# EAGLE board 3_draft_onBoard (EAGLE 8.1.0)

Size 88.57 x 88.89 mm. Coordinates in mm from the lower left corner, seen from the top.
Outline: 0,0 88.57,0 88.57,88.89 0,88.89 0,0
Copper layers (1*16): Top 0.035mm / dielectric 1.5mm / Bottom 0.035mm
Design rules "default *": minimum track width 8mil, minimum drill 14mil, track to track 8mil, track to pad 8mil, pad to pad 8mil, via to via 8mil, smd to smd 8mil, copper to edge 40mil, drill to drill 8mil, minimum pad ring 10mil, minimum via ring 8mil, stop-mask expansion 4mil, vias tented up to drill 0mil, thermal gap 10mil

## Footprints (pad centres in the part's own frame; a part is rotated, then mirrored left to right if it is on the bottom)
QFP80P900X900X120-32N = smd 1.473 x 0.508: 1 -4.242,2.794; 2 -4.242,2.007; 3 -4.242,1.194; 4 -4.242,0.406; 5 -4.242,-0.406; 6 -4.242,-1.194; 7 -4.242,-2.007; 8 -4.242,-2.794; 17 4.242,-2.794; 18 4.242,-2.007; 19 4.242,-1.194; 20 4.242,-0.406; 21 4.242,0.406; 22 4.242,1.194; 23 4.242,2.007; 24 4.242,2.794 | smd 0.508 x 1.473: 9 -2.794,-4.242; 10 -2.007,-4.242; 11 -1.194,-4.242; 12 -0.406,-4.242; 13 0.406,-4.242; 14 1.194,-4.242; 15 2.007,-4.242; 16 2.794,-4.242; 25 2.794,4.242; 26 2.007,4.242; 27 1.194,4.242; 28 0.406,4.242; 29 -0.406,4.242; 30 -1.194,4.242; 31 -2.007,4.242; 32 -2.794,4.242
0402-CAP = smd 0.7 x 0.9: 1 -0.65,0; 2 0.65,0
EIA3216 = smd 1.4 x 1.6: A 1.4,0; C -1.4,0
SOT23-3 = smd 0.8 x 0.9: 1 -0.95,-1; 2 0.95,-1; 3 0,1.1
0603 = smd 1.1 x 1: 1 -0.85,0; 2 0.85,0
SSOP20_L = smd 0.381 x 1.143: 1 -2.857,-2.68; 2 -2.223,-2.68; 3 -1.587,-2.68; 4 -0.953,-2.68; 5 -0.318,-2.68; 6 0.318,-2.68; 7 0.953,-2.68; 8 1.587,-2.68; 9 2.223,-2.68; 10 2.857,-2.68; 11 2.857,2.68; 12 2.223,2.68; 13 1.587,2.68; 14 0.953,2.68; 15 0.318,2.68; 16 -0.318,2.68; 17 -0.953,2.68; 18 -1.587,2.68; 19 -2.223,2.68; 20 -2.857,2.68
SOT223 = smd 1.219 x 2.235: 1 -2.311,-3.099; 2 0,-3.099; 3 2.311,-3.099 | smd 3.6 x 2.2: 4 0,3.099
TSSOP14 = smd 0.35 x 0.9: 1 -1.95,-2.925; 2 -1.3,-2.925; 3 -0.65,-2.925; 4 0,-2.925; 5 0.65,-2.925; 6 1.3,-2.925; 7 1.95,-2.925; 8 1.95,2.925; 9 1.3,2.925; 10 0.65,2.925; 11 0,2.925; 12 -0.65,2.925; 13 -1.3,2.925; 14 -1.95,2.925
SC70-5 = smd 0.35 x 0.8: 1 -0.65,-0.95; 2 0,-0.95; 3 0.65,-0.95; 4 0.65,0.95; 5 -0.65,0.95
1X15 = drill 1.016 pad 1.88: 1 0,0; 2 2.54,0; 3 5.08,0; 4 7.62,0; 5 10.16,0; 6 12.7,0; 7 15.24,0; 8 17.78,0; 9 20.32,0; 10 22.86,0; 11 25.4,0; 12 27.94,0; 13 30.48,0; 14 33.02,0; 15 35.56,0
MICRO-USB-DIGIKEY-FCI2 = smd 0.4 x 1.35: D+ 0,2.67; D- -0.65,2.67; GND 1.3,2.67; ID 0.65,2.67; VCC -1.3,2.67 | smd 2.1 x 1.6: SHIELD -3.1,2.55; SHIELD1 3.1,2.55 | smd 1.8 x 1.9: SHIELD2 -3.8,0; SHIELD3 -1.15,0; SHIELD4 1.15,0; SHIELD5 3.8,0
1X02_LOCK = drill 1.016 pad 1.88: 1 -0.178,0; 2 2.718,0
1X01 = drill 1.016 pad 1.88: 1 0,0
1X03 = drill 1.016 pad 1.88: 1 0,0; 2 2.54,0; 3 5.08,0
SMT-JUMPER_2_NO_NO-SILK_ROUND = smd 0.152 x 0.305: 1 -1.27,0; 2 1.27,0
QFN24-4X4 = smd 0.7 x 0.25: 1 -1.9,1.25; 2 -1.9,0.75; 3 -1.9,0.25; 4 -1.9,-0.25; 5 -1.9,-0.75; 6 -1.9,-1.25; 13 1.9,-1.25; 14 1.9,-0.75; 15 1.9,-0.25; 16 1.9,0.25; 17 1.9,0.75; 18 1.9,1.25 | smd 0.25 x 0.7: 7 -1.25,-1.9; 8 -0.75,-1.9; 9 -0.25,-1.9; 10 0.25,-1.9; 11 0.75,-1.9; 12 1.25,-1.9; 19 1.25,1.9; 20 0.75,1.9; 21 0.25,1.9; 22 -0.25,1.9; 23 -0.75,1.9; 24 -1.25,1.9 | smd 2.45 x 2.45: EXP 0,0
SOT23 = smd 1 x 1.4: 1 -0.95,-1.1; 2 0.95,-1.1; 3 0,1.1
TACTILE-SWITCH-SMD = smd 1.524 x 0.762: 1 -2.794,1.905; 2 2.794,1.905; 3 -2.794,-1.905; 4 2.794,-1.905
TO-92 = drill 0.813 pad 1.88: 1 -1.27,0; 2 0,1.905; 3 1.27,0
SOT323W_INFINEON = smd 1 x 0.8: 1 -0.8,0.65; 2 0.8,0; 3 -0.8,-0.65
MICROSD2 = smd 0.8 x 1.5: CD/DAT3/SS/CS 8.95,2.6; CLK 5.65,2.6; CMD 7.85,2.6; DAT0 3.45,2.6; DAT1 2.35,2.6; DAT2 10.05,2.6; VDD 6.75,2.6; VSS 4.55,2.6 | smd 1.45 x 2: GND 0,8.3; GND2 13.7,8.3; GND3 13.7,0; GND4 0,0
TC33X-2 = smd 1.2 x 1.2: 1 -1.8,1; 3 -1.8,-1 | smd 1.5 x 1.6: 2 1.5,0
RESONATOR-SMD-7.4X3.4 = smd 1.7 x 4: 1 -2.5,0; 3 2.5,0 | smd 1.5 x 4: 2 0,0

## Placement (x,y rotation side)
ATMEGA328P-AU  ATMEGA328P-AU  [QFP80P900X900X120-32N]  44.45,44.45 0 top
C1  .1uF  [0402-CAP]  -44.45,81.28 0 top  (outside the outline)
C2  .1uF  [0402-CAP]  -48.26,81.28 0 top  (outside the outline)
C3  10nF  [0402-CAP]  -52.07,81.28 0 top  (outside the outline)
C4  2.2nF  [0402-CAP]  -55.88,81.28 0 top  (outside the outline)
C5  .1uF  [0402-CAP]  8.89,43.18 0 top
C6  47pF  [0402-CAP]  8.89,45.72 0 top
C7  .1uF  [0402-CAP]  8.89,48.26 0 top
C8  .1uF  [0402-CAP]  -71.12,81.28 0 top  (outside the outline)
C9  .01 uF  [0402-CAP]  -74.93,81.28 0 top  (outside the outline)
C10  47pF  [0402-CAP]  8.89,41.91 0 top
C11  10uF  [EIA3216]  -20.32,81.28 0 top  (outside the outline)
C12  10uF  [EIA3216]  -26.67,81.28 0 top  (outside the outline)
C13  10uF  [EIA3216]  -33.02,81.28 0 top  (outside the outline)
C14  .01uF  [0402-CAP]  -15.24,85.09 0 top  (outside the outline)
C15  47uF  [EIA3216]  -39.37,81.28 0 top  (outside the outline)
C16  .1uF  [0402-CAP]  -19.05,85.09 0 top  (outside the outline)
C17  100pF  [0402-CAP]  -22.86,85.09 0 top  (outside the outline)
C18  10uF  [0402-CAP]  -26.67,85.09 0 top  (outside the outline)
D5  700mA/40V/533mV  [SOT23-3]  80.01,24.13 0 top
FB1  30Ω/1.8A  [0603]  -67.31,73.66 0 top  (outside the outline)
FB2  30Ω/1.8A  [0603]  -72.39,73.66 0 top  (outside the outline)
FB3  30Ω/1.8A  [0603]  13.97,41.91 0 top
FTDI231XS1  FT231XS  [SSOP20_L]  22.86,44.45 0 top
IC1  [SOT223]  24.13,22.86 0 top
IC2  [SOT223]  8.89,24.13 0 top
IC3  74ABT125PW  [TSSOP14]  25.4,59.69 0 top
IC4  MAX4466KS  [SC70-5]  60.96,82.55 0 top
J1  [1X15]  38.1,64.77 0 top
J2  USB_MINI-B_DIGIKEY  [MICRO-USB-DIGIKEY-FCI2]  2.54,44.44 270 top
J2PHOTO_B  [1X02_LOCK]  83.82,39.37 0 top
J5_IR_LED_B  [1X02_LOCK]  82.55,44.45 0 top
J7_5V_BACKUP  [1X01]  33.02,26.67 0 top
J7_MIC_B  [1X02_LOCK]  85.09,60.96 0 top
J7_TMP1  [1X02_LOCK]  83.82,33.02 0 top
J8  [1X15]  38.1,69.85 0 top
J8_BUZ_B  [1X02_LOCK]  83.82,55.88 0 top
J8_NEO_B  [1X03]  80.01,29.21 0 top
J8_TMP  [1X02_LOCK]  -55.88,72.39 0 top  (outside the outline)
JP1  JUMPER-SMT_2_NO_NO-SILK_ROUND  [SMT-JUMPER_2_NO_NO-SILK_ROUND]  31.75,20.32 0 top
MPU6050  MPU-6050  [QFN24-4X4]  73.66,58.42 0 top
Q1  NPN 40V 1A SOT-23  [SOT23]  17.78,38.1 0 top
Q2  [SOT23]  77.47,50.8 0 top
R1  10k  [0603]  -77.47,73.66 0 top  (outside the outline)
R2  10k  [0603]  -15.24,77.47 0 top  (outside the outline)
R3  10k  [0603]  24.13,50.8 0 top
R4  10k  [0603]  19.05,49.53 0 top
R5  27  [0603]  13.97,46.99 0 top
R6  10k  [0603]  -30.48,77.47 0 top  (outside the outline)
R7  27  [0603]  13.97,49.53 0 top
R8  1k  [0603]  -38.1,77.47 0 top  (outside the outline)
R9  1k  [0603]  -41.91,77.47 0 top  (outside the outline)
R10  1k  [0603]  -45.72,77.47 0 top  (outside the outline)
R11  1k  [0603]  -49.53,77.47 0 top  (outside the outline)
R12  2.2K  [0603]  -53.34,77.47 0 top  (outside the outline)
R14  10k  [0603]  -57.15,77.47 0 top  (outside the outline)
R15  1k  [0603]  -60.96,77.47 0 top  (outside the outline)
R16  1k  [0603]  -64.77,77.47 0 top  (outside the outline)
R17  22k  [0603]  -68.58,77.47 0 top  (outside the outline)
R18  1M  [0603]  -72.39,77.47 0 top  (outside the outline)
R19  1M  [0603]  -76.2,77.47 0 top  (outside the outline)
R20  1k  [0603]  -80.01,77.47 0 top  (outside the outline)
R21  1k  [0603]  -15.24,81.28 0 top  (outside the outline)
S1  TAC_SWITCHSMD  [TACTILE-SWITCH-SMD]  20.32,83.82 0 top
TMP36  [TO-92]  -53.34,59.69 0 top  (outside the outline)
U$1  1N7002PW  [SOT323W_INFINEON]  26.67,39.37 0 top
U$2  WM6698TR-ND_MICROSD  [MICROSD2]  15.24,53.34 90 top
U$3  TC33X-2POT  [TC33X-2]  53.34,82.55 0 top
Y1  [RESONATOR-SMD-7.4X3.4]  22.86,7.62 0 top

## Library data of the parts
ATMEGA328P-AU = Atmega-328pu; DESCRIPTION: 8-bit Microcontroller with In-System Programmable Flash; MPN: ATMEGA328P-AU; OC_FARNELL: 1715486; OC_NEWARK: 14R4631; PACKAGE: TQFP-32; SUPPLIER: Atmel
C1-C10 C14 C16-C18 = SparkFun-Retired; PROD_ID: CAP-09885
C11-C13 C15 = SparkFun-Retired; PROD_ID: CAP-00811
D5 = SparkFun-DiscreteSemi; PROD_ID: DIO-08411
FB1-FB3 = SparkFun-Coils; PROD_ID: NDUC-07859
FTDI231XS1 = SparkFun-IC-Comms; PROD_ID: IC-11524
IC1 IC2 = linear-technology; MPN: LT1129CST-5#PBF; OC_FARNELL: 1663375; OC_NEWARK: 57M2069
IC3 = 74xx-us
IC4 J2 MPU6050 U$1-U$3 = KevinKuwata1
J1 J2PHOTO_B J5_IR_LED_B J7_5V_BACKUP J7_MIC_B J7_TMP1 J8 J8_BUZ_B J8_NEO_B J8_TMP = SparkFun-Connectors
JP1 = SparkFun-Jumpers
Q1 Q2 = semicon-smd-ipc
R1-R12 R14-R21 = SparkFun-Resistors; PROD_ID: RES-12535
S1 = SparkFun-Retired; PROD_ID: SWCH-08247
TMP36 = SparkFun-Sensors; PROD_ID: IC-09880; SF_ID: SEN-10988
Y1 = SparkFun-Clocks

## Nets
3.3V: ATMEGA328P-AU.3 ATMEGA328P-AU.5 ATMEGA328P-AU.21 C1.2 C2.2 C3.2 C4.2 C5.2 C6.2 C8.2 C9.2 C10.2 C11.C C12.C C13.C C15.C FB2.2 FTDI231XS1.6 FTDI231XS1.16 IC1.2 IC2.2 IC3.1 IC3.4 IC3.10 J2.GND J7_TMP1.2 J8.2 J8_NEO_B.3 MPU6050.18 Q1.2 Q2.2 S1.3 S1.4 U$2.GND2 U$2.GND3 U$2.VSS Y1.2
3.3VFTDI: C1.1 FTDI231XS1.3 FTDI231XS1.13 FTDI231XS1.14 R3.2 U$1.1
5V: ATMEGA328P-AU.4 ATMEGA328P-AU.6 ATMEGA328P-AU.18 C2.1 C5.1 FB1.1 FB3.1 IC2.1 J2.VCC J5_IR_LED_B.1 J8.12 J8_NEO_B.2 JP1.1 MPU6050.13 R1.1 R2.1 R4.1 R6.1 R12.1 U$1.3
A0: ATMEGA328P-AU.23 J2PHOTO_B.2 J8.4 R12.2
A1: ATMEGA328P-AU.24 J8.5 TMP36.2
A2: ATMEGA328P-AU.25 J8.6
A3: ATMEGA328P-AU.26 J8.7
A6: ATMEGA328P-AU.19 IC4.5 J8.10
A7: ATMEGA328P-AU.22 J8.11
ADO: MPU6050.9
AREF: J8.3
BUZ+: J8_BUZ_B.1 R10.1
BUZ-: J8_BUZ_B.2 Q2.3 R10.2
D2: ATMEGA328P-AU.32 J1.5
D3: ATMEGA328P-AU.1 J1.6 R11.2
D4: ATMEGA328P-AU.2 J1.7
D5: ATMEGA328P-AU.9 J1.8
D6: ATMEGA328P-AU.10 J1.9
D7: ATMEGA328P-AU.11 J1.10 R15.2
D8: ATMEGA328P-AU.12 J1.11
D9: ATMEGA328P-AU.13 J1.12 J8_NEO_B.1
DTR: C7.1 R4.2 S1.1 S1.2
DTR_FTDI: FTDI231XS1.1 R3.1 U$1.2
GND: C16.2 C18.2 FB2.1 IC1.4 IC2.4 IC3.7 IC4.2 J1.4 J2PHOTO_B.1 J7_MIC_B.2 J8.14 R18.2
INT: MPU6050.12
IR_-: J5_IR_LED_B.2 Q1.3
IR_LED: Q1.1 R15.1
MISO: ATMEGA328P-AU.16 J1.15 R14.2 U$2.DAT0
MOSI: ATMEGA328P-AU.15 IC3.5 J1.14
N$1: ATMEGA328P-AU.7 Y1.1
N$2: ATMEGA328P-AU.8 Y1.3
N$3: C4.1 MPU6050.20
N$4: C8.1 MPU6050.10
N$5: C3.1 MPU6050.8
N$6: ATMEGA328P-AU.20 C9.1
N$7: C6.1 J2.D+ R5.1
N$8: U$2.GND U$2.GND4
N$9: IC3.3 U$2.CLK
N$10: IC3.6 U$2.DAT1
N$11: IC3.8 U$2.CMD
N$12: R17.1 U$3.1
N$13: C10.1 J2.D- R7.1
N$14: FTDI231XS1.11 R7.2
N$15: FTDI231XS1.12 R5.2
N$16: C11.A FB3.2 FTDI231XS1.15
N$17: C16.1 R16.1 R20.2
N$20: Q2.1 R11.1
N$22: D5.1 J7_TMP1.1
N$23: C12.A IC1.3 J7_5V_BACKUP.1 JP1.2
N$24: C14.1 J7_MIC_B.1 R16.2
N$25: C14.2 IC4.1 R18.1 R19.2
N$29: C18.1 R21.1
N$30: C17.1 IC4.3 R17.2 R21.2
N$32: C17.2 IC4.4 U$3.2 U$3.3
RESET: ATMEGA328P-AU.29 J1.3 J8.13 R6.2
RX: FTDI231XS1.4 R9.1
RX-I: ATMEGA328P-AU.30 J1.2 R8.2
RXLED: FTDI231XS1.17
SCK: ATMEGA328P-AU.17 IC3.2 J8.1
SCL: ATMEGA328P-AU.27 J8.9 MPU6050.23 R2.2
SDA: ATMEGA328P-AU.28 C7.2 J8.8 MPU6050.24 R1.2
SS: ATMEGA328P-AU.14 IC3.9 J1.13
TMP+: J8_TMP.1 TMP36.1
TMP-: J8_TMP.2 TMP36.3
TX: FTDI231XS1.20 R8.1
TX-O: ATMEGA328P-AU.31 J1.1 R9.2
TXLED: FTDI231XS1.10
VCC: C13.A FB1.2 IC2.3 IC3.11 IC3.12 IC3.13 IC3.14 R14.1 R19.1 R20.1 U$2.VDD
VIN: C15.A D5.3 IC1.1 J8.15

## Tracks (layer width: path | path; a pad name or v marks a point on that pad's centre or on a via)
3.3V  (36 unrouted)
3.3VFTDI  (5 unrouted)
5V  (19 unrouted)
A0  (3 unrouted)
A1  (2 unrouted)
A2  (1 unrouted)
A3  (1 unrouted)
A6  (2 unrouted)
A7  (1 unrouted)
BUZ+  (1 unrouted)
BUZ-  (2 unrouted)
D2  (1 unrouted)
D3  (2 unrouted)
D4  (1 unrouted)
D5  (1 unrouted)
D6  (1 unrouted)
D7  (2 unrouted)
D8  (1 unrouted)
D9  (2 unrouted)
DTR  (3 unrouted)
DTR_FTDI  (2 unrouted)
GND  (11 unrouted)
IR_-  (1 unrouted)
IR_LED  (1 unrouted)
MISO  (3 unrouted)
MOSI  (2 unrouted)
N$1  (1 unrouted)
N$2  (1 unrouted)
N$3  (1 unrouted)
N$4  (1 unrouted)
N$5  (1 unrouted)
N$6  (1 unrouted)
N$7  (2 unrouted)
N$8  (1 unrouted)
N$9  (1 unrouted)
N$10  (1 unrouted)
N$11  (1 unrouted)
N$12  (1 unrouted)
N$13  (2 unrouted)
N$14  (1 unrouted)
N$15  (1 unrouted)
N$16  (2 unrouted)
N$17  (2 unrouted)
N$20  (1 unrouted)
N$22  (1 unrouted)
N$23  (3 unrouted)
N$24  (2 unrouted)
N$25  (3 unrouted)
N$29  (1 unrouted)
N$30  (3 unrouted)
N$32  (3 unrouted)
RESET  (3 unrouted)
RX  (1 unrouted)
RX-I  (2 unrouted)
SCK  (2 unrouted)
SCL  (3 unrouted)
SDA  (4 unrouted)
SS  (2 unrouted)
TMP+  (1 unrouted)
TMP-  (1 unrouted)
TX  (1 unrouted)
TX-O  (2 unrouted)
VCC  (10 unrouted)
VIN  (3 unrouted)